# EAGLE board STM8_IoT_Board (EAGLE 7.4.0)
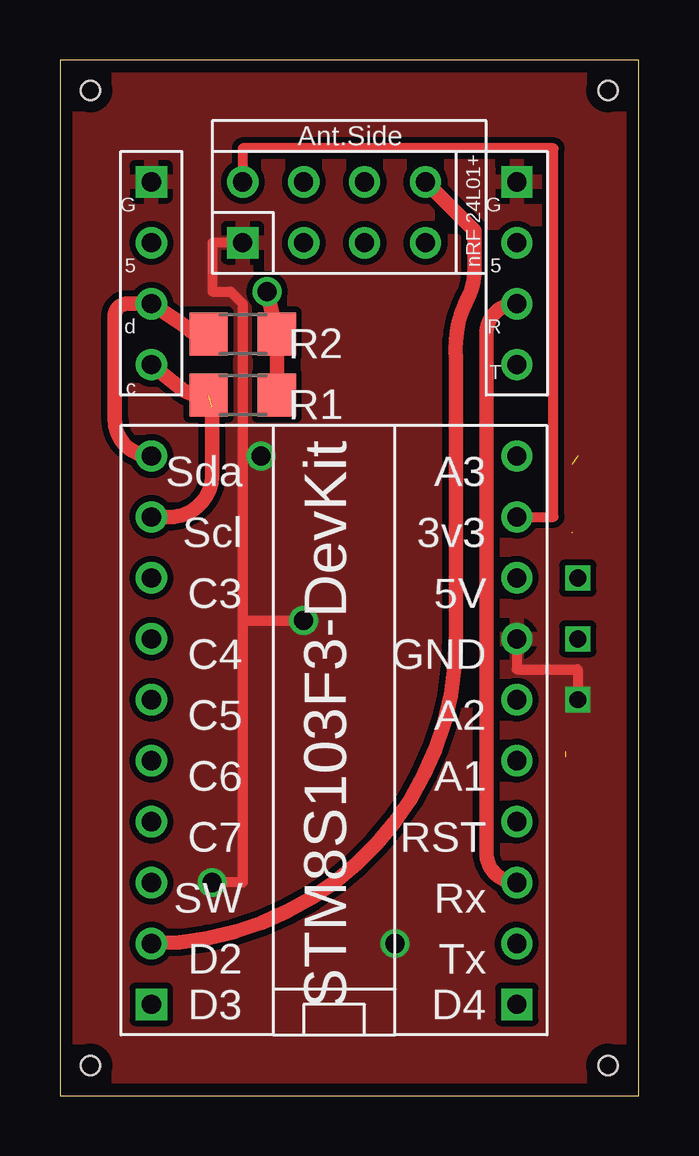
[diagram p0: board, top side]
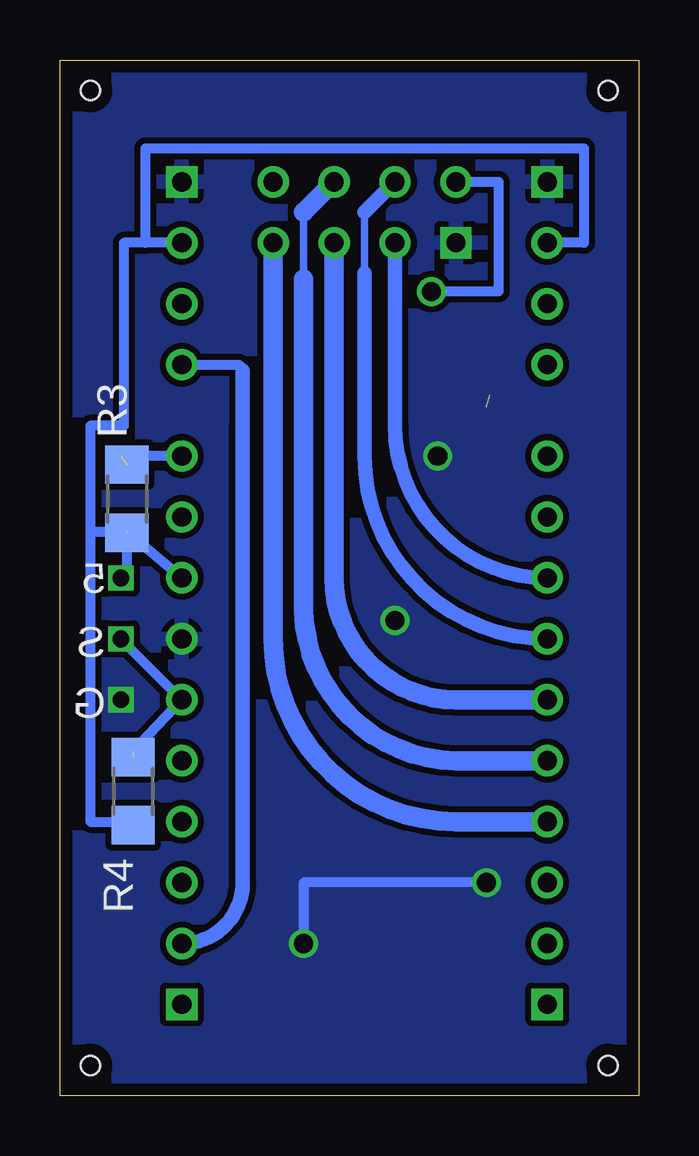
[diagram p1: board, bottom side, seen from below]

Size 24.13 x 43.18 mm. Coordinates in mm from the lower left corner, seen from the top.
Outline: 0,0 24.13,0 24.13,43.18 0,43.17 0,0
Copper layers (1*16): Top 0.035mm / dielectric 1.5mm / Bottom 0.035mm
Design rules "EagleRules": minimum track width 7mil, minimum drill 12mil, track to track 7mil, track to pad 7mil, pad to pad 7mil, via to via 7mil, smd to smd 0mil, copper to edge 20mil, drill to drill 10mil, minimum pad ring 10mil, minimum via ring 6mil, stop-mask expansion 2mil, vias tented up to drill 25mil, thermal gap 10mil
Net classes: 0 default: width 0.305 mm, drill 0.508 mm, clearance 0.254 mm
Holes 0.8 mm at 1.27,1.27 22.86,1.27 22.86,41.91 1.27,41.91

## Footprints (pad centres in the part's own frame; a part is rotated, then mirrored left to right if it is on the bottom)
R1206 = smd 1.6 x 1.803: 1 -1.422,0; 2 1.422,0
STM8S103F3-DEVKIT-MINI = drill 0.8: 3V3 -7.62,-7.62; 5V -7.62,-5.08; A1 -7.62,2.54; A2 -7.62,0; A3 -7.62,-10.16; B4 7.62,-7.62; B5 7.62,-10.16; C3 7.62,-5.08; C4 7.62,-2.54; C5 7.62,0; C6 7.62,2.54; C7 7.62,5.08; D1 7.62,7.62; D2 7.62,10.16; D5 -7.62,10.16; D6 -7.62,7.62; GND -7.62,-2.54; RST -7.62,5.08 | drill 0.8 square: D3 7.62,12.7; D4 -7.62,12.7
NRF24L01+REFDESIGN-MINI = drill 0.8 square: 1 -1.27,3.81 | drill 0.8: 2 1.27,3.81; 3 -1.27,1.27; 4 1.27,1.27; 5 -1.27,-1.27; 6 1.27,-1.27; 7 -1.27,-3.81; 8 1.27,-3.81
UART-MINI = drill 0.8 square: 1 0,0 | drill 0.8: 2 0,2.54; 3 0,5.08; 4 0,7.62
I2C-MINI = drill 0.8 square: 1 0,0 | drill 0.8: 2 0,2.54; 3 0,5.08; 4 0,7.62

## Placement (x,y rotation side)
R1  1k  [R1206]  7.62,29.21 180 top
R2  1k  [R1206]  7.62,31.75 180 top
R3  1k  [R1206]  21.34,24.89 90 bottom
R4  1k  [R1206]  21.08,12.7 90 bottom
U$1  STM8S103F3-DEVKITMINI  [STM8S103F3-DEVKIT-MINI]  11.43,16.51 180 top
U$2  NRF24L01+REFDESIGNMINI  [NRF24L01+REFDESIGN-MINI]  11.43,36.83 90 top
U$3  UARTMINI  [UART-MINI]  19.05,38.1 180 top
U$4  I2CMINI  [I2C-MINI]  3.81,38.1 180 top

## Library data of the parts
R1-R4 = resistor
U$1 = STM8DevKit
U$2 = nRF24L01+RefDesign
U$3 U$4 = WFConnectors

## Nets
3V3: R1.1 R2.1 U$1.3V3 U$2.2
5V: R3.1 R4.1 U$1.5V U$3.2 U$4.2
GND: U$1.GND U$2.1 U$3.1 U$4.1
N$1: U$1.D5 U$3.4
N$2: U$1.C3 U$2.3
N$3: U$1.C4 U$2.4
N$4: U$1.C5 U$2.5
N$5: U$1.C6 U$2.6
N$6: U$1.C7 U$2.7
N$7: R2.2 U$1.B5 U$4.3
N$8: U$1.D2 U$2.8
N$9: U$1.D6 U$3.3
N$10: R3.2 U$1.A3
N$11: R1.2 U$1.B4 U$4.4
N$12: R4.2 U$1.A2

## Tracks (layer width: path | path; a pad name or v marks a point on that pad's centre or on a via)
3V3  (via drill 0.8)
  Top 0.406: U$2.2 7.62,39.5 20.57,39.5 20.57,24.13 U$1.3V3
  Top 0.61: v8.64,33.53 R2.1 R1.1
  Bottom 0.406: U$2.2 5.84,38.1 5.84,33.53 v8.64,33.53
5V  (via drill 0.7)  (1 unrouted)
  Bottom 0.406: U$1.5V 21.34,23.5 22.86,23.5 | U$3.2 20.57,35.56 | 20.57,35.56 21.46,35.56 21.46,27.94 22.86,27.94 22.86,23.5 | U$4.2 2.29,35.56 2.29,39.5 20.57,39.5 20.57,35.56 | v21.59,21.59 21.34,21.59 R3.1 | 22.86,23.5 22.86,11.43 21.08,11.43 R4.1
GND  (via drill 0.7, 0.8)
  Top 0.406: U$1.GND 19.05,17.78 21.59,17.78 v21.59,16.51 | v8.38,26.67 7.62,26.67 | 7.62,26.67 7.62,19.81 | 7.62,19.81 v10.16,19.81 | 7.62,19.81 7.62,8.89 v6.35,8.89 | U$2.1 6.35,35.56 6.35,33.53 7.11,33.53 7.62,33.02 7.62,26.67
  Bottom 0.406: v6.35,8.89 13.97,8.89 v13.97,6.35
  pour Top: 0,43.18 0,0 24.13,0 24.13,43.18
  pour Bottom: 0,43.18 0,0 24.13,0 24.13,43.18
N$1
  Bottom 0.406: U$3.4 16.76,30.48 arc90 16.51,30.23
  Bottom 0.61: U$1.D5 arc-90 16.51,8.89 16.51,27.94 16.51,30.23
N$2
  Bottom 0.61: U$1.C3 arc90 10.16,27.94 U$2.3
N$3
  Bottom 0.305: 11.43,34.29 11.43,36.83
  Bottom 0.61: U$1.C4 arc90 11.43,26.67 11.43,34.29 | U$2.4 11.43,36.83
N$4
  Bottom 0.813: U$1.C5 7.62,16.51 arc90 12.7,21.59 U$2.5
N$5
  Bottom 0.305: 13.97,36.83 13.97,34.04
  Bottom 0.813: U$1.C6 7.62,13.97 arc92 13.97,20.83 13.97,34.04 | U$2.6 13.97,36.83
N$6
  Bottom 0.813: U$1.C7 7.62,11.43 arc90 15.24,19.05 U$2.7
N$7
  Top 0.61: R2.2 5.84,31.75 arc-53 5.33,32 U$4.3 2.79,33.02 arc90 2.29,32.51 2.29,28.19 arc90 U$1.B5
N$8
  Top 0.61: U$1.D2 arc90 16.51,19.05 16.51,30.73 arc-34 17.02,33.27 arc28 17.27,34.29 17.27,36.07 U$2.8
N$9
  Top 0.61: U$1.D6 arc-90 17.78,10.16 17.78,31.75 arc-90 U$3.3
N$10  (1 unrouted)
  Bottom 0.406: U$1.A3 21.59,26.67
N$11  (1 unrouted)
  Top 0.61: R1.2 5.84,29.21 arc-37 5.08,29.46 U$4.4 | U$1.B4 4.57,24.13 arc90 6.35,25.91 6.35,28.7
N$12  (via drill 0.7)  (1 unrouted)
  Bottom 0.406: 21.08,14.35 U$1.A2 v21.59,19.05

## Text on the board
bPlace: 5 | S | G